# EAGLE board ESC (EAGLE 9.4.1)
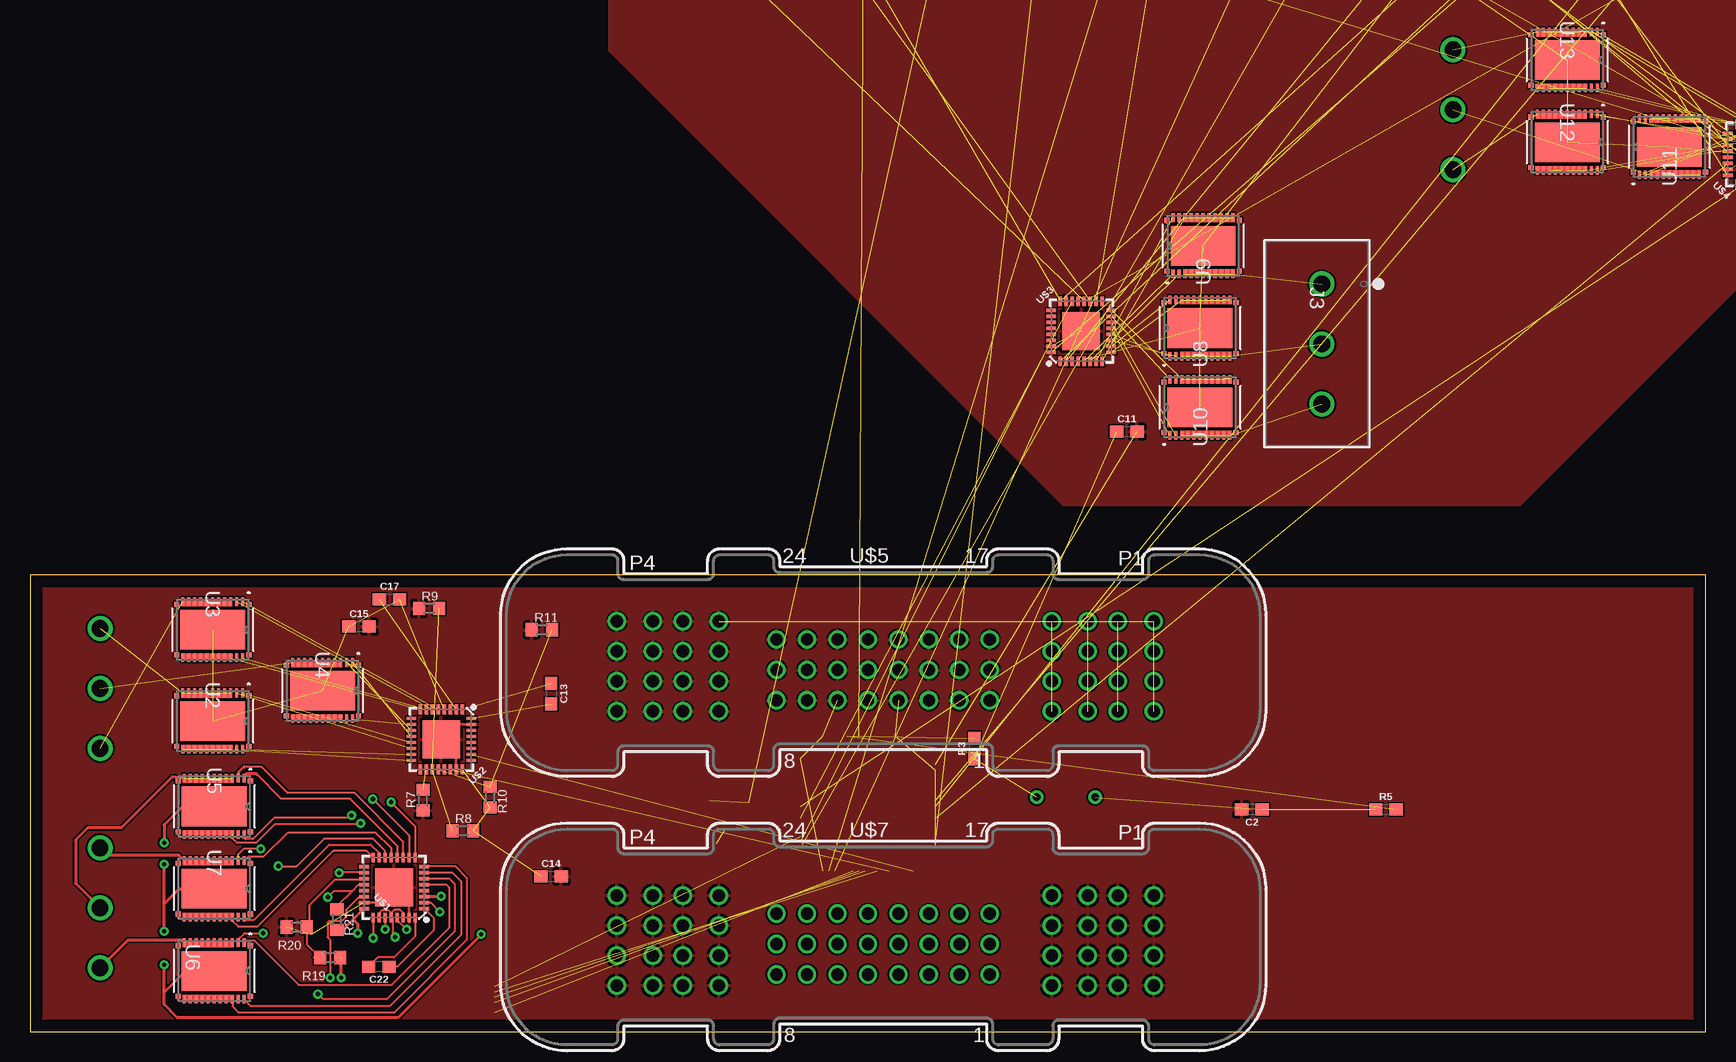
[diagram p0: board, top side]
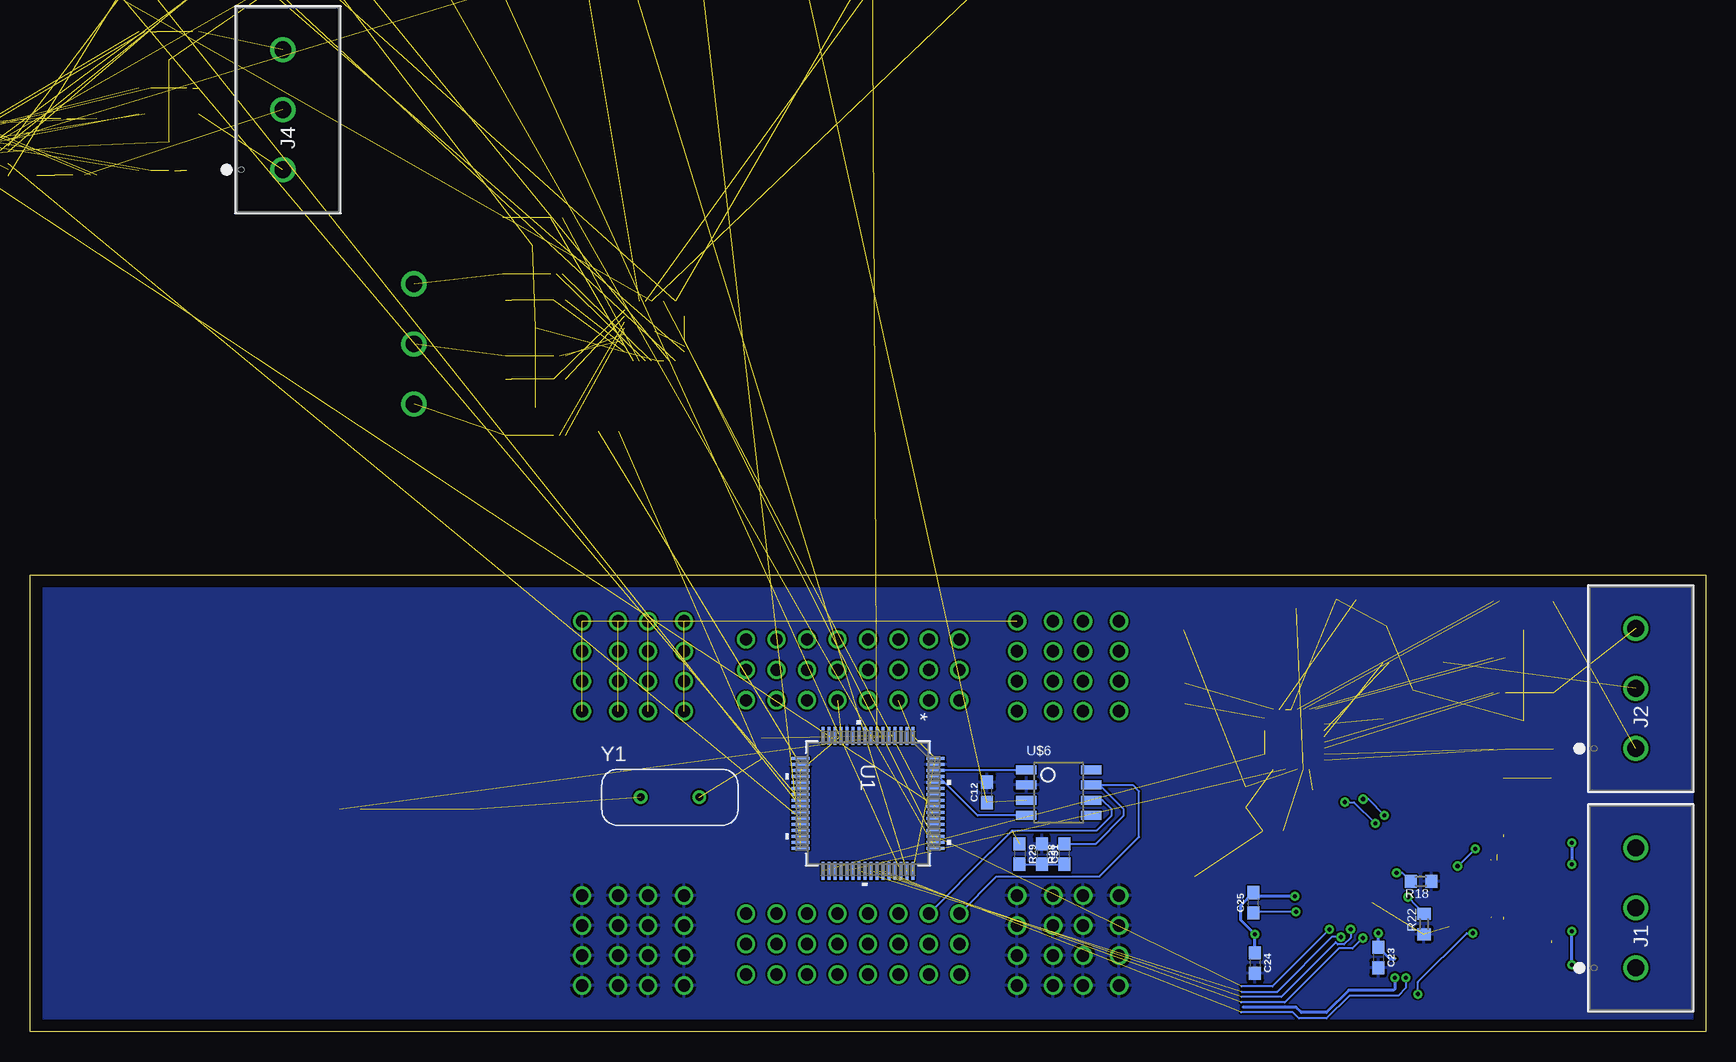
[diagram p1: board, bottom side, seen from below]

Size 139.7 x 38.1 mm. Coordinates in mm from the lower left corner, seen from the top.
Outline: 0,0 139.7,0 139.7,38.1 0,38.1 0,0
Copper layers (1*16): Top 0.035mm / dielectric 1.5mm / Bottom 0.035mm
Design rules "default": minimum track width 6mil, minimum drill 0.35mm, track to track 6mil, track to pad 6mil, pad to pad 6mil, via to via 6mil, smd to smd 6mil, copper to edge 40mil, drill to drill 6mil, minimum pad ring 10mil, minimum via ring 8mil, stop-mask expansion 4mil, vias tented up to drill 0mil, thermal gap 10mil

## Footprints (pad centres in the part's own frame; a part is rotated, then mirrored left to right if it is on the bottom)
0603 = smd 1.1 x 1: 1 -0.85,0; 2 0.85,0
LED_VISHAY_TLMX1100 = smd 0.66 x 0.889: 1 -0.876,0; 2 0.876,0
CONN_1755529 = drill 1.397 pad 1.905: 1 0,0; 2 5.004,0; 3 10.008,0
R0603 = smd 1 x 1.1: 1 -0.85,0; 2 0.85,0
SW_2512 = smd 1.8 x 3.2: 1 -2.8,0; 2 2.8,0
FE05-1 = drill 0.813 long: 1 -5.08,0; 2 -2.54,0; 3 0,0; 4 2.54,0; 5 5.08,0
LQFP-64 = smd 1.473 x 0.229: 1 -5.626,3.75; 2 -5.626,3.25; 3 -5.626,2.75; 4 -5.626,2.25; 5 -5.626,1.75; 6 -5.626,1.25; 7 -5.626,0.75; 8 -5.626,0.25; 9 -5.626,-0.25; 10 -5.626,-0.75; 11 -5.626,-1.25; 12 -5.626,-1.75; 13 -5.626,-2.25; 14 -5.626,-2.75; 15 -5.626,-3.25; 16 -5.626,-3.75; 33 5.626,-3.75; 34 5.626,-3.25; 35 5.626,-2.75; 36 5.626,-2.25; 37 5.626,-1.75; 38 5.626,-1.25; 39 5.626,-0.75; 40 5.626,-0.25; 41 5.626,0.25; 42 5.626,0.75; 43 5.626,1.25; 44 5.626,1.75; 45 5.626,2.25; 46 5.626,2.75; 47 5.626,3.25; 48 5.626,3.75 | smd 0.229 x 1.473: 17 -3.75,-5.626; 18 -3.25,-5.626; 19 -2.75,-5.626; 20 -2.25,-5.626; 21 -1.75,-5.626; 22 -1.25,-5.626; 23 -0.75,-5.626; 24 -0.25,-5.626; 25 0.25,-5.626; 26 0.75,-5.626; 27 1.25,-5.626; 28 1.75,-5.626; 29 2.25,-5.626; 30 2.75,-5.626; 31 3.25,-5.626; 32 3.75,-5.626; 49 3.75,5.626; 50 3.25,5.626; 51 2.75,5.626; 52 2.25,5.626; 53 1.75,5.626; 54 1.25,5.626; 55 0.75,5.626; 56 0.25,5.626; 57 -0.25,5.626; 58 -0.75,5.626; 59 -1.25,5.626; 60 -1.75,5.626; 61 -2.25,5.626; 62 -2.75,5.626; 63 -3.25,5.626; 64 -3.75,5.626
DMM0022A = smd 0.711 x 0.254: 1 -2.35,2.5; 2 -2.35,2; 3 -2.35,1.5; 4 -2.35,1; 5 -2.35,0.5; 6 -2.35,0; 7 -2.35,-0.5; 8 -2.35,-1; 9 -2.35,-1.5; 10 -2.35,-2; 11 -2.35,-2.5; 12 2.35,-2.5; 13 2.35,-2; 14 2.35,-1.5; 15 2.35,-1; 16 2.35,-0.5; 17 2.35,0; 18 2.35,0.5; 19 2.35,1; 20 2.35,1.5; 21 2.35,2; 22 2.35,2.5 | smd 0.432 x 0.432: 23 -2.115,3.013; 24 -2.115,-3.013; 25 2.115,-3.013; 26 2.115,3.013 | smd 3.302 x 5.41: 27 0,0
QFN-32-5X5MM = smd 0.285 x 0.8: 1 -1.75,-2.5; 2 -1.25,-2.5; 3 -0.75,-2.5; 4 -0.25,-2.5; 5 0.25,-2.5; 6 0.75,-2.5; 7 1.25,-2.5; 8 1.75,-2.5; 17 1.75,2.5; 18 1.25,2.5; 19 0.75,2.5; 20 0.25,2.5; 21 -0.25,2.5; 22 -0.75,2.5; 23 -1.25,2.5; 24 -1.75,2.5 | smd 0.8 x 0.285: 9 2.5,-1.75; 10 2.5,-1.25; 11 2.5,-0.75; 12 2.5,-0.25; 13 2.5,0.25; 14 2.5,0.75; 15 2.5,1.25; 16 2.5,1.75; 25 -2.5,1.75; 26 -2.5,1.25; 27 -2.5,0.75; 28 -2.5,0.25; 29 -2.5,-0.25; 30 -2.5,-0.75; 31 -2.5,-1.25; 32 -2.5,-1.75 | smd 3.15 x 3.15: EP 0,0
SAMTEC = drill 1.02 pad 1.22: 1 10.16,-2.84; 2 7.62,-2.84; 3 5.08,-2.84; 4 2.54,-2.84; 5 0,-2.84; 6 -2.54,-2.84; 7 -5.08,-2.84; 8 -7.62,-2.84; 9 10.16,-0.3; 10 7.62,-0.3; 11 5.08,-0.3; 12 2.54,-0.3; 13 0,-0.3; 14 -2.54,-0.3; 15 -5.08,-0.3; 16 -7.62,-0.3; 17 10.16,2.24; 18 7.62,2.24; 19 5.08,2.24; 20 2.54,2.24; 21 0,2.24; 22 -2.54,2.24; 23 -5.08,2.24; 24 -7.62,2.24; P1-1 23.83,-3.75; P1-2 23.83,-1.25; P1-3 23.83,1.25; P1-4 23.83,3.75; P1-5 20.83,-3.75; P1-6 20.83,-1.25; P1-7 20.83,1.25; P1-8 20.83,3.75; P2-1 18.33,-3.75; P2-2 18.33,-1.25; P2-3 18.33,1.25; P2-4 18.33,3.75; P2-5 15.33,-3.75; P2-6 15.33,-1.25; P2-7 15.33,1.25; P2-8 15.33,3.75; P3-1 -12.43,-3.75; P3-2 -12.43,-1.25; P3-3 -12.43,1.25; P3-4 -12.43,3.75; P3-5 -15.43,-3.75; P3-6 -15.43,-1.25; P3-7 -15.43,1.25; P3-8 -15.43,3.75; P4-1 -17.93,-3.75; P4-2 -17.93,-1.25; P4-3 -17.93,1.25; P4-4 -17.93,3.75; P4-5 -20.93,-3.75; P4-6 -20.93,-1.25; P4-7 -20.93,1.25; P4-8 -20.93,3.75
TCAN337D = smd 1.7 x 0.75: CANH 5.4,2.54; CANL 5.4,1.27; FAULT 5.4,0; GND 0,2.54; RXD 0,0; S 5.4,3.81; TXD 0,3.81; VCC 0,1.27
XTAL_ECS-80-S-4X = drill 0.63 pad 1.03: 1 -2.44,0; 2 2.44,0

## Placement (x,y rotation side)
C1  2.2uF  [0603]  93.22,97.03 0 top  (outside the outline)
C2  4.7uF  [0603]  101.85,18.54 180 top
C3  2.2uF  [0603]  85.6,97.03 0 top  (outside the outline)
C4  4.7uF  [0603]  81.79,97.03 0 top  (outside the outline)
C5  4.7uF  [0603]  77.98,97.03 0 top  (outside the outline)
C10  4.7uF  [0603]  70.36,97.03 0 top  (outside the outline)
C11  4.7uF  [0603]  91.44,50.04 0 top  (outside the outline)
C12  4.7uF  [0603]  59.92,19.96 90 bottom
C13  47nF  [0603]  43.43,28.19 270 top
C14  1.0uF  [0603]  43.43,12.95 0 top
C15  0.1uF  [0603]  27.43,33.78 0 top
C16  4.7uF  [0603]  144.02,102.11 0 top  (outside the outline)
C17  1.0uF  [0603]  29.97,36.07 0 top
C18  47nF  [0603]  136.4,102.11 0 top  (outside the outline)
C19  1.0uF  [0603]  132.59,102.11 0 top  (outside the outline)
C20  0.1uF  [0603]  128.78,102.11 0 top  (outside the outline)
C21  1.0uF  [0603]  124.97,102.11 0 top  (outside the outline)
C22  47nF  [0603]  29.08,5.44 180 top
C23  1.0uF  [0603]  27.3,6.2 270 bottom
C24  0.1uF  [0603]  37.59,5.74 270 bottom
C25  1.0uF  [0603]  37.72,10.77 90 bottom
C26  47nF  [0603]  105.92,102.11 0 top  (outside the outline)
C27  1.0uF  [0603]  102.11,102.11 0 top  (outside the outline)
C28  0.1uF  [0603]  98.3,102.11 0 top  (outside the outline)
C29  1.0uF  [0603]  94.49,102.11 0 top  (outside the outline)
C30  4.7uF  [0603]  90.68,102.11 0 top  (outside the outline)
C31  0.1uF  [0603]  55.35,14.83 270 bottom
C32  4.7uF  [0603]  83.06,102.11 0 top  (outside the outline)
C33  4.7uF  [0603]  79.25,102.11 0 top  (outside the outline)
C34  4.7uF  [0603]  75.44,102.11 0 top  (outside the outline)
C35  4.7uF  [0603]  71.63,102.11 0 top  (outside the outline)
C38  4.7uF  [0603]  67.82,102.11 0 top  (outside the outline)
C39  4.7uF  [0603]  64.01,102.11 0 top  (outside the outline)
C40  4.7uF  [0603]  60.2,102.11 0 top  (outside the outline)
C41  4.7uF  [0603]  151.64,105.92 0 top  (outside the outline)
GREEN_LED  TLMS1100-GS08  [LED_VISHAY_TLMX1100]  114.81,105.92 0 top  (outside the outline)
J1  1755529  [CONN_1755529]  5.84,5.33 90 bottom
J2  1755529  [CONN_1755529]  5.84,23.62 90 bottom
J3  1755529  [CONN_1755529]  107.7,62.36 270 top  (outside the outline)
J4  1755529  [CONN_1755529]  118.62,71.88 90 bottom  (outside the outline)
R1  1k  [0603]  147.83,105.92 0 top  (outside the outline)
R2  1k  [0603]  144.02,105.92 0 top  (outside the outline)
R3  1k  [0603]  78.74,23.62 90 top
R4  1k  [0603]  136.4,105.92 0 top  (outside the outline)
R5  1k  [0603]  113.03,18.54 0 top
R7  47k  [R0603]  32.77,19.3 90 top
R8  [R0603]  36.07,16.76 0 top
R9  [R0603]  33.27,35.31 0 top
R10  [R0603]  38.35,19.56 270 top
R11  [R0603]  42.67,33.53 0 top
R13  47k  [R0603]  93.22,91.95 0 top  (outside the outline)
R14  [R0603]  67.82,90.68 0 top  (outside the outline)
R15  [R0603]  62.74,90.68 0 top  (outside the outline)
R16  [R0603]  57.66,90.68 0 top  (outside the outline)
R17  [R0603]  150.37,97.03 0 top  (outside the outline)
R18  47k  [R0603]  23.75,12.55 180 bottom
R19  [R0603]  25.02,6.2 0 top
R20  [R0603]  22.23,8.74 0 top
R21  [R0603]  25.58,9.35 270 top
R22  [R0603]  23.5,8.99 90 bottom
R23  47k  [R0603]  83.06,91.95 0 top  (outside the outline)
R24  [R0603]  124.97,97.03 0 top  (outside the outline)
R25  [R0603]  119.89,97.03 0 top  (outside the outline)
R26  [R0603]  114.81,97.03 0 top  (outside the outline)
R27  [R0603]  109.73,97.03 0 top  (outside the outline)
R28  60  [0603]  53.47,14.83 90 bottom
R29  60  [0603]  57.2,14.83 270 bottom
RED_LED  TLMS1100-GS08  [LED_VISHAY_TLMX1100]  104.65,105.92 0 top  (outside the outline)
RESET1  [SW_2512]  133.86,90.68 0 top  (outside the outline)
SV2  [FE05-1]  104.65,90.68 0 top  (outside the outline)
U1  STM32F405RGT6  [LQFP-64]  69.85,19.05 270 bottom
U2  CSD88584Q5DCT  [DMM0022A]  15.24,25.91 270 top
U3  CSD88584Q5DCT  [DMM0022A]  15.24,33.53 270 top
U4  CSD88584Q5DCT  [DMM0022A]  24.38,28.45 270 top
U5  CSD88584Q5DCT  [DMM0022A]  15.37,18.8 270 top
U6  CSD88584Q5DCT  [DMM0022A]  15.37,5.08 270 top
U7  CSD88584Q5DCT  [DMM0022A]  15.37,11.94 270 top
U8  CSD88584Q5DCT  [DMM0022A]  97.54,58.67 90 top  (outside the outline)
U9  CSD88584Q5DCT  [DMM0022A]  97.79,65.53 90 top  (outside the outline)
U10  CSD88584Q5DCT  [DMM0022A]  97.54,52.07 90 top  (outside the outline)
U11  CSD88584Q5DCT  [DMM0022A]  136.65,73.79 90 top  (outside the outline)
U12  CSD88584Q5DCT  [DMM0022A]  128.14,74.17 270 top  (outside the outline)
U13  CSD88584Q5DCT  [DMM0022A]  128.14,81.03 270 top  (outside the outline)
U$1  DRV8320H  [QFN-32-5X5MM]  30.35,12.04 90 top
U$2  DRV8320H  [QFN-32-5X5MM]  34.29,24.38 180 top
U$3  DRV8320H  [QFN-32-5X5MM]  87.63,58.42 0 top  (outside the outline)
U$4  DRV8320H  [QFN-32-5X5MM]  144.02,73.15 90 top  (outside the outline)
U$5  SAMTEC  [SAMTEC]  69.85,30.48 0 top
U$6  TCAN337D  [TCAN337D]  56.64,18.03 0 bottom
U$7  SAMTEC  [SAMTEC]  69.85,7.62 0 top
Y1  ECS-80-S-4X  [XTAL_ECS-80-S-4X]  86.36,19.56 0 bottom

## Library data of the parts
C1 C3 = SparkFun-Capacitors; PROD_ID: CAP-07888
C2 C4 C5 C10-C12 C16 C30 C32-C35 C38-C41 = SparkFun-Capacitors; PROD_ID: CAP-08280
C13 C18 C22 C26 = SparkFun-Capacitors; PROD_ID: CAP-08605
C14 C17 C19 C21 C23 C25 C27 C29 = SparkFun-Capacitors; PROD_ID: CAP-00868
C15 C20 C24 C28 C31 = SparkFun-Capacitors; PROD_ID: CAP-00810
GREEN_LED RED_LED = VESC_SHIT; MANUFACTURER_PART_NUMBER: TLMS1100GS08; VENDOR: Vishay
J1-J4 = VESC_SHIT; MANUFACTURER_PART_NUMBER: 1755529; VENDOR: Phoenix Contact
R1-R5 R28 R29 = SparkFun-Resistors; PROD_ID: RES-07856
R7-R11 R13-R27 = rcl; SPICEPREFIX: R
RESET1 = DiscreteComponents
SV2 = con-lsta; OC_FARNELL: unknown; OC_NEWARK: unknown
U1 = VESC_SHIT; MANUFACTURER_PART_NUMBER: STM32F405RGT6; VENDOR: STMicroelectronics
U2-U13 = VESC_SHIT; MANUFACTURER_PART_NUMBER: CSD88584Q5DCT; VENDOR: Texas Instruments
U$1-U$5 U$7 = VESC_SHIT
U$6 = PI_Shield_Library
Y1 = ECS-80-S-4X; DESCRIPTION: Crystal 8MHz Series 2-Pin HC-49/U; DIGI-KEY_PART_NUMBER: X1057-ND; DIGI-KEY_PURCHASE_URL: https://www.digikey.com/product-detail/en/ecs-inc/ECS-80-S-4X/X1057-ND/827549?utm_source=snapeda&utm_medium=aggregator&utm_campaign=symbol; MF: ECS International; MP: ECS-80-S-4X; PACKAGE: HC-49/US ECS International

## Nets
3V3: U1.1 U1.13 U1.19 U1.32 U1.48 U1.64 U$5.1 U$5.2 U$5.3 U$5.4 U$5.5 U$5.6 U$5.7 U$5.8 U$5.9 U$5.10 U$5.11 U$5.12 U$5.13 U$5.14 U$5.15 U$5.16 U$5.17 U$5.18 U$5.19 U$5.20 U$5.21 U$5.22 U$5.23 U$5.24
12V: U$5.P1-1 U$5.P1-2 U$5.P1-3 U$5.P1-4 U$5.P1-5 U$5.P1-6 U$5.P1-7 U$5.P1-8 U$5.P2-1 U$5.P2-2 U$5.P2-3 U$5.P2-4 U$5.P2-5 U$5.P2-6 U$5.P2-7 U$5.P2-8 U$5.P3-1 U$5.P3-2 U$5.P3-3 U$5.P3-4 U$5.P3-5 U$5.P3-6 U$5.P3-7 U$5.P3-8 U$5.P4-1 U$5.P4-2 U$5.P4-3 U$5.P4-4 U$5.P4-5 U$5.P4-6 U$5.P4-7 U$5.P4-8
+3V3: C4.1 C5.1 C12.1 C16.1 C30.1 C32.1 C33.1 C34.1 C35.1 C38.1 C39.1 C40.1 C41.1 R4.2 SV2.5 U$6.VCC
CAN_H: R28.2 U$6.CANH U$7.24
CAN_L: R29.1 U$6.CANL U$7.23
CAN_RX: U1.61 U$6.RXD
CAN_TX: U1.62 U$6.TXD
DVDD_1: C14.1 R8.2 R10.2 U$2.24
DVDD_2: C23.1 R19.2 R21.2 U$1.24
DVDD_3: C19.1 R14.2 R16.2 U$3.24
DVDD_4: C27.1 R24.2 R26.2 U$4.24
EN_1: U1.37 U$2.22
EN_2: U1.43 U$1.22
EN_3: U1.54 U$3.22
EN_4: U1.27 U$4.22
FAULT_1: U1.38
FAULT_2: U1.44
FAULT_3: U1.55
FAULT_4: U1.28
GHA_1: U3.1 U$2.5
GHA_2: U6.1 U$1.5
GHA_3: U9.1 U$3.5
GHA_4: U12.1 U$4.5
GHB_1: U4.1 U$2.12
GHB_2: U5.1 U$1.12
GHB_3: U8.1 U$3.12
GHB_4: U11.1 U$4.12
GHC_1: U2.1 U$2.13
GHC_2: U7.1 U$1.13
GHC_3: U10.1 U$3.13
GHC_4: U13.1 U$4.13
GLA_1: U3.22 U$2.7
GLA_2: U6.22 U$1.7
GLA_3: U9.22 U$3.7
GLA_4: U12.22 U$4.7
GLB_1: U4.22 U$2.10
GLB_2: U5.22 U$1.10
GLB_3: U8.22 U$3.10
GLB_4: U11.22 U$4.10
GLC_1: U2.22 U$2.15
GLC_2: U7.22 U$1.15
GLC_3: U10.22 U$3.15
GLC_4: U13.22 U$4.15
GND: C1.2 C2.2 C3.2 C4.2 C5.2 C10.2 C11.2 C12.2 C14.2 C15.2 C16.2 C19.2 C20.2 C23.2 C24.2 C27.2 C28.2 C30.2 C31.1 C32.2 C33.2 C34.2 C35.2 C38.2 C39.2 C40.2 C41.2 GREEN_LED.1 R7.1 R9.1 R11.1 R13.1 R15.1 R17.1 R18.1 R20.1 R22.1 R23.1 R25.1 R27.1 RED_LED.1 RESET1.1 SV2.3 U1.12 U1.18 U1.60 U1.63 U$1.23 U$1.31 U$1.EP U$2.23 U$2.31 U$2.EP U$3.23 U$3.31 U$3.EP U$4.23 U$4.31 U$4.EP U$6.GND U$7.P1-1 U$7.P1-2 U$7.P1-3 U$7.P1-4 U$7.P1-5 U$7.P1-6 U$7.P1-7 U$7.P1-8 U$7.P2-1 U$7.P2-2 U$7.P2-3 U$7.P2-4 U$7.P2-5 U$7.P2-6 U$7.P2-7 U$7.P2-8 U$7.P3-1 U$7.P3-2 U$7.P3-3 U$7.P3-4 U$7.P3-5 U$7.P3-6 U$7.P3-7 U$7.P3-8 U$7.P4-1 U$7.P4-2 U$7.P4-3 U$7.P4-4 U$7.P4-5 U$7.P4-6 U$7.P4-7 U$7.P4-8
IDRIVE: R19.1 R20.2 U$1.19
INHA_1: U1.36
INHA_2: U1.42 U$1.25
INHA_3: U1.53
INHA_4: U1.59
INHB_1: U1.35
INHB_2: U1.41 U$1.27
INHB_3: U1.52
INHB_4: U1.58
INHC_1: U1.34
INHC_2: U1.40
INHC_3: U1.51 U$1.29
INHC_4: U1.57
INL_1: U1.33 U$2.26 U$2.28 U$2.30
INL_2: U1.39 U$1.26 U$1.28 U$1.30
INL_3: U1.50 U$3.26 U$3.28 U$3.30
INL_4: U1.56 U$4.26 U$4.28 U$4.30
N$1: R1.2 U1.24
N$2: GREEN_LED.2 R1.1
N$3: R2.1 RED_LED.2
N$4: R2.2 U1.25
N$5: C1.1 U1.47
N$6: C3.1 U1.31
N$7: C11.1 R3.1 Y1.2
N$8: C2.1 R5.1 Y1.1
N$9: C13.1 U$2.1
N$10: U$2.25
N$11: U$2.27
N$14: U$2.29
N$16: C13.2 U$2.32
N$17: R8.1 R9.2 U$2.19
N$18: R7.2 U$2.18
N$19: R10.1 R11.2 U$2.20
N$20: U$3.25
N$21: U$3.27
N$22: U$3.29
N$23: C21.1 U$3.2
N$24: C18.1 U$3.1
N$25: C18.2 U$3.32
N$26: R14.1 R15.2 U$3.19
N$27: R13.2 U$3.18
N$28: R16.1 R17.2 U$3.20
N$30: C25.1 U$1.2
N$31: C22.1 U$1.1
N$32: C22.2 U$1.32
N$34: C17.1 U$2.2
N$35: R18.2 U$1.18
N$37: U$4.25
N$38: U$4.27
N$39: U$4.29
N$40: C29.1 U$4.2
N$41: C26.1 U$4.1
N$42: C26.2 U$4.32
N$43: R24.1 R25.2 U$4.19
N$44: R23.2 U$4.18
N$45: R26.1 R27.2 U$4.20
N$46: C31.2 R28.1 R29.2
NRST: C10.1 R4.1 RESET1.2 SV2.1 U1.7
OSC_IN: R5.2 U1.5
OSC_OUT: R3.2 U1.6
PHASE_A1: J2.1 U3.3 U3.4 U3.5 U3.6 U3.7 U3.8 U3.9 U3.10 U3.11
PHASE_A2: J1.1 U6.3 U6.4 U6.5 U6.6 U6.7 U6.8 U6.9 U6.10 U6.11
PHASE_A3: J3.1 U9.3 U9.4 U9.5 U9.6 U9.7 U9.8 U9.9 U9.10 U9.11
PHASE_A4: J4.1 U12.3 U12.4 U12.5 U12.6 U12.7 U12.8 U12.9 U12.10 U12.11
PHASE_B1: J2.2 U4.3 U4.4 U4.5 U4.6 U4.7 U4.8 U4.9 U4.10 U4.11
PHASE_B2: J1.2 U5.3 U5.4 U5.5 U5.6 U5.7 U5.8 U5.9 U5.10 U5.11
PHASE_B3: J3.2 U8.3 U8.4 U8.5 U8.6 U8.7 U8.8 U8.9 U8.10 U8.11
PHASE_B4: J4.2 U11.3 U11.4 U11.5 U11.6 U11.7 U11.8 U11.9 U11.10 U11.11
PHASE_C1: J2.3 U2.3 U2.4 U2.5 U2.6 U2.7 U2.8 U2.9 U2.10 U2.11
PHASE_C2: J1.3 U7.3 U7.4 U7.5 U7.6 U7.7 U7.8 U7.9 U7.10 U7.11
PHASE_C3: J3.3 U10.3 U10.4 U10.5 U10.6 U10.7 U10.8 U10.9 U10.10 U10.11
PHASE_C4: J4.3 U13.3 U13.4 U13.5 U13.6 U13.7 U13.8 U13.9 U13.10 U13.11
SHA_1: U3.2 U$2.6
SHA_2: U6.2 U$1.6
SHA_3: U9.2 U$3.6
SHA_4: U12.2 U$4.6
SHB_1: U4.2 U$2.11
SHB_2: U5.2 U$1.11
SHB_3: U8.2 U$3.11
SHB_4: U11.2 U$4.11
SHC_1: U2.2 U$2.14
SHC_2: U7.2 U$1.14
SHC_3: U10.2 U$3.14
SHC_4: U13.2 U$4.14
SLA_1: U3.12 U3.13 U3.14 U3.15 U3.16 U3.17 U3.18 U3.19 U3.20 U$2.8
SLA_2: U6.12 U6.13 U6.14 U6.15 U6.16 U6.17 U6.18 U6.19 U6.20 U$1.8
SLA_3: U9.12 U9.13 U9.14 U9.15 U9.16 U9.17 U9.18 U9.19 U9.20 U$3.8
SLA_4: U12.12 U12.13 U12.14 U12.15 U12.16 U12.17 U12.18 U12.19 U12.20 U$4.8
SLB_1: U$2.9
SLB_2: U5.12 U5.13 U5.14 U5.15 U5.16 U5.17 U5.18 U5.19 U5.20 U$1.9
SLB_3: U8.12 U8.13 U8.14 U8.15 U8.16 U8.17 U8.18 U8.19 U8.20 U$3.9
SLB_4: U11.12 U11.13 U11.14 U11.15 U11.16 U11.17 U11.18 U11.19 U11.20 U$4.9
SLC_1: U2.12 U2.13 U2.14 U2.15 U2.16 U2.17 U2.18 U2.19 U2.20 U$2.16
SLC_1B: U4.12 U4.13 U4.14 U4.15 U4.16 U4.17 U4.18 U4.19 U4.20
SLC_2: U7.12 U7.13 U7.14 U7.15 U7.16 U7.17 U7.18 U7.19 U7.20 U$1.16
SLC_3: U10.12 U10.13 U10.14 U10.15 U10.16 U10.17 U10.18 U10.19 U10.20 U$3.16
SLC_4: U13.12 U13.13 U13.14 U13.15 U13.16 U13.17 U13.18 U13.19 U13.20 U$4.16
SWCLK: SV2.4 U1.49
SWDIO: SV2.2 U1.46
VDS: R21.1 R22.2 U$1.20
VM_1: C15.1 C17.2 U2.27 U3.27 U4.27 U$2.3 U$2.4
VM_2: C24.1 C25.2 U5.27 U6.27 U7.27 U$1.3 U$1.4
VM_3: C20.1 C21.2 U8.27 U9.27 U10.27 U$3.3 U$3.4
VM_4: C28.1 C29.2 U11.27 U12.27 U13.27 U$4.3 U$4.4

## Tracks (layer width: path | path; a pad name or v marks a point on that pad's centre or on a via)
3V3  (6 unrouted)
  pour Top: 62.23,33.53 80.26,33.53 80.77,33.02 80.77,32.77 80.77,27.43 80.26,26.92 79.76,26.92 61.98,26.92 61.47,27.43 61.47,33.02 61.98,33.53
12V  (16 unrouted)
  Top 0.152: U$5.P3-5 54.36,26.73 54.42,26.79
  pour Top: 48.77,35.05 57.66,35.05 58.29,34.42 58.29,26.54 57.66,25.91 48.77,25.91 48.13,26.54 48.13,34.42
12V1
  pour Top: 84.96,35.03 93.85,35.03 94.49,34.39 94.49,26.52 93.85,25.88 84.96,25.88 84.33,26.52 84.33,34.39
+3V3  (15 unrouted)
CAN_H
  Bottom 0.152: 50.55,20.57 47.75,20.57 47.24,20.07 47.24,16.26 50.55,12.95 59.14,12.95 U$7.24 62.23,9.91 | 50.55,20.57 U$6.CANH | R28.2 50.86,15.68 48.51,18.03 48.51,18.54 50.55,20.57
CAN_L  (1 unrouted)
  Bottom 0.152: U$6.CANL 50.29,19.3 49.53,18.54 49.53,18.03 50.8,16.76 57.87,16.76 59.64,14.99 59.67,14.96 U$7.23
CAN_RX
  Bottom 0.152: U$6.RXD 60.71,18.03 64.01,21.34 64.19,21.34 U1.61
CAN_TX
  Bottom 0.152: U1.62 64.18,21.84 U$6.TXD
DVDD_1  (3 unrouted)
DVDD_2  (via drill 0.35)  (1 unrouted)
  Top 0.152: 25.87,4.58 25.89,4.55 v25.93,4.52 | 27.85,10.21 U$1.24 | v27.31,8.24 v27.3,8.23 | 26.04,8.47 26.04,8.23 25.84,8.23 R21.2
  Top 0.254: R19.2 25.89,6.18 25.89,4.55 | 26.94,9.38 26.06,8.5 R21.2 25.87,8.21 | 26.94,9.38 27.31,9.01 v27.31,8.24 | 26.94,9.38 27.78,10.21 27.85,10.21
  Bottom 0.254: v25.93,4.52 25.93,3.59 26.04,3.48 29.77,3.48 31.62,1.63 33.73,1.63 34.16,2.06 38.58,2.06 | v27.3,8.23 C23.1 26.35,6.1 25.91,6.1
DVDD_3  (3 unrouted)
DVDD_4  (3 unrouted)
EN_1  (1 unrouted)
EN_2  (via drill 0.35)  (1 unrouted)
  Top 0.152: U$1.22 27.72,11.16 27.36,11.16 26.36,10.16 26.36,9.6 25.98,9.23 24.93,9.23 24.8,9.09 24.8,7.9 25.02,7.68 v25.02,4.52
  Bottom 0.152: v25.02,4.52 25.02,3.66 25.65,3.02 29.72,3.02 31.62,1.12 33.91,1.12 34.42,1.63 38.73,1.63
EN_3  (1 unrouted)
EN_4  (1 unrouted)
GHA_1  (1 unrouted)
GHA_2
  Top 0.152: U$1.5 34.67,12.29 34.92,12.04 34.92,8.69 30.15,3.91 22.39,3.91 18.69,7.61 18.07,7.61 17.94,7.48 17.94,7.47 U6.1
GHA_3  (1 unrouted)
GHA_4  (1 unrouted)
GHB_1  (1 unrouted)
GHB_2
  Top 0.152: 18.92,21.46 20.95,19.43 26.7,19.43 30.6,15.52 U$1.12
  Top 0.254: U5.1 17.89,21.27 17.89,21.34 18.05,21.51 18.87,21.51 18.92,21.46
GHB_3  (1 unrouted)
GHB_4  (1 unrouted)
GHC_1  (1 unrouted)
GHC_2  (1 unrouted)
  Top 0.152: U$1.13 30.1,15.34 28.83,16.61 21.49,16.61 19.45,14.58 18.18,14.58 17.94,14.34 17.94,14.33
GHC_3  (1 unrouted)
GHC_4  (1 unrouted)
GLA_1  (1 unrouted)
GLA_2
  Top 0.152: U6.22 17.94,2.64 17.94,2.63 18.37,2.19 30.03,2.19 35.94,8.1 35.94,12.55 35.2,13.29 U$1.7
GLA_3  (1 unrouted)
GLA_4  (1 unrouted)
GLB_1  (1 unrouted)
GLB_2  (via drill 0.35)
  Top 0.152: U$1.10 31.6,16.38 v28.57,19.41 | v26.8,18.06 26.61,17.87 20.38,17.87 18.6,16.08 17.98,16.08 17.87,16.19 U5.22
  Bottom 0.152: v26.8,18.06 28.15,19.41 v28.57,19.41
GLB_3  (1 unrouted)
GLB_4  (1 unrouted)
GLC_1  (1 unrouted)
GLC_2  (1 unrouted)
  Top 0.152: 17.94,9.49 18.07,9.35 18.69,9.35 24.93,15.6 28.41,15.6 29.1,14.9 U$1.15
GLC_3  (1 unrouted)
GLC_4  (1 unrouted)
GND  (5 unrouted)
  Top 0.152: U$1.31 31.6,10.79 U$1.EP 29.1,10.79 U$1.23 | U$2.23 35.54,23.13 34.42,24.26 | 34.42,24.26 U$2.EP | U$2.31 35.79,25.63 34.42,24.26
  pour Top: 0,38.1 0,0 139.7,0 139.7,38.1
  pour Bottom: 0,0 139.7,0 139.7,38.1 0,38.1
  pour Top: 48.26,112.78 48.26,81.79 86.11,43.94 124.21,43.94 168.91,88.65 168.91,106.68 161.54,114.05 49.78,114.05
IDRIVE
  Top 0.152: 23.66,6.2 R19.1 23.07,7.29 R20.2 23.27,8.94 23.27,10.54 25.4,12.66 27.72,12.66 U$1.19
INHA_2  (via drill 0.35)  (1 unrouted)
  Top 0.152: U$1.25 v28.6,7.83 v28.6,7.82
  Bottom 0.152: v28.6,7.82 29.46,6.96 30.61,6.96 35.1,2.46 38.73,2.46
INHB_2  (via drill 0.35)  (1 unrouted)
  Top 0.152: U$1.27 29.6,8.57 v29.62,8.56
  Bottom 0.152: v29.62,8.56 29.62,7.85 30.17,7.3 30.69,7.3 30.86,7.47 35.41,2.92 38.71,2.92
INHC_3  (via drill 0.35)  (1 unrouted)
  Top 0.152: v31.39,8.53 30.6,9.32 U$1.29
  Bottom 0.152: v31.39,8.53 36.13,3.79 38.71,3.79
INL_1  (3 unrouted)
INL_2  (via drill 0.35)  (1 unrouted)
  Top 0.152: 30.1,9.9 30.37,10.17 30.84,10.17 31.1,9.9 U$1.30 | 30.1,9.9 U$1.28 30.23,9.41 30.23,8.11 v30.44,7.9 | U$1.26 29.1,9.9 29.37,10.17 29.84,10.17 30.1,9.9
  Bottom 0.152: v30.44,7.9 30.44,7.93 31.16,7.93 35.74,3.35 38.71,3.35
INL_3  (3 unrouted)
INL_4  (3 unrouted)
N$1  (1 unrouted)
N$2  (1 unrouted)
N$3  (1 unrouted)
N$4  (1 unrouted)
N$5  (1 unrouted)
N$6  (1 unrouted)
N$7  (2 unrouted)
N$8  (2 unrouted)
N$9  (1 unrouted)
N$16  (1 unrouted)
N$17  (2 unrouted)
N$18  (1 unrouted)
N$19  (2 unrouted)
N$23  (1 unrouted)
N$24  (1 unrouted)
N$25  (1 unrouted)
N$26  (2 unrouted)
N$27  (1 unrouted)
N$28  (2 unrouted)
N$30  (via drill 0.35)
  Top 0.152: U$1.2 33.38,10.79 v34.16,10.01
  Bottom 0.152: v34.16,10.01 37.63,10.01 C25.1
N$31
  Top 0.152: U$1.1 33.66,9.49 33.66,8.48 30.61,5.44 C22.1
N$32
  Top 0.152: C22.2 29,6.2 30.35,6.2 32.1,7.95 U$1.32
N$34  (1 unrouted)
N$35  (via drill 0.35)
  Top 0.152: U$1.18 25.8,13.29 v25.78,13.27
  Bottom 0.152: v25.78,13.27 25.32,13.27 R18.2
N$40  (1 unrouted)
N$41  (1 unrouted)
N$42  (1 unrouted)
N$43  (2 unrouted)
N$44  (1 unrouted)
N$45  (2 unrouted)
N$46
  Bottom 0.152: R29.2 C31.2 R28.1
NRST  (4 unrouted)
OSC_IN  (1 unrouted)
OSC_OUT  (1 unrouted)
PHASE_A1  (1 unrouted)
  Top 0.152: U3.11 U3.10 U3.9 U3.8 U3.7 U3.6 U3.5 U3.4 U3.3
PHASE_A2  (1 unrouted)
  Top 0.152: U6.11 U6.10 U6.9 U6.8 U6.7 U6.6 U6.5 U6.4 U6.3
  Top 0.254: 12.87,7.65 12.7,7.65 12.69,7.67 8.17,7.67 J1.1
PHASE_A3  (9 unrouted)
PHASE_A4  (1 unrouted)
  Top 0.152: U12.3 U12.4 U12.5 U12.6 U12.7 U12.8 U12.9 U12.10 U12.11
PHASE_B1  (1 unrouted)
  Top 0.152: U4.11 U4.10 U4.9 U4.8 U4.7 U4.6 U4.5 U4.4 U4.3
PHASE_B2  (8 unrouted)
  Top 0.254: U5.11 11.85,21.25 7.62,17.02 4.83,17.02 3.81,16 3.81,12.37 J1.2
PHASE_B3  (9 unrouted)
PHASE_B4  (7 unrouted)
  Top 0.152: U11.11 U11.4 U11.3
PHASE_C1  (9 unrouted)
PHASE_C2
  Top 0.152: U7.3 16.38,14.26 15.88,14.26 | U7.6 14.86,14.26 14.35,14.26 13.84,14.26 13.34,14.26
  Top 0.254: 13.34,14.26 U7.11 12.4,14.73 6.45,14.73 J1.3 | U7.10 13.84,14.26 | U7.9 14.35,14.26 | U7.8 14.86,14.26 | U7.7 U7.6 15.5,14.28 15.88,14.26 | U7.5 16.38,14.26 | U7.4 U7.3
PHASE_C3  (9 unrouted)
PHASE_C4  (8 unrouted)
  Top 0.152: U13.3 U13.11
SHA_1  (1 unrouted)
SHA_2  (via drill 0.35)
  Top 0.152: v19.43,8.23 17.89,8.23 17.37,7.71 U6.2 | v24,3.15 24.43,2.72 29.72,2.72 35.43,8.43 35.43,12.29 34.94,12.79 U$1.6
  Bottom 0.152: v24,3.15 24,4.17 19.94,8.23 v19.43,8.23
SHA_3  (1 unrouted)
SHA_4  (1 unrouted)
SHB_1  (1 unrouted)
SHB_2
  Top 0.152: U$1.11 31.1,15.84 | 31.11,15.85 31.1,15.84 | 17.89,22.07 19.3,22.07 21.46,19.91 27.05,19.91 31.1,15.86 31.1,15.84
  Top 0.254: 17.89,22.07 17.81,22.07 17.37,21.62 U5.2
SHB_3  (1 unrouted)
SHB_4  (1 unrouted)
SHC_1  (1 unrouted)
SHC_2  (via drill 0.35)  (1 unrouted)
  Top 0.152: v20.7,13.82 22.23,13.82 24.51,16.1 28.6,16.1 29.6,15.1 U$1.14 | v19.23,15.27 17.83,15.27 17.37,14.8
  Bottom 0.152: v20.7,13.82 20.68,13.82 v19.23,15.27
SHC_3  (1 unrouted)
SHC_4  (1 unrouted)
SLA_1  (1 unrouted)
  Top 0.152: U3.20 U3.19 U3.18 U3.17 U3.16 U3.15 U3.14 U3.13 U3.12
SLA_2
  Top 0.152: U6.12 U6.13 U6.14 U6.15 U6.16 U6.17 U6.18 U6.19 U6.20 16.89,2.68 16.89,2.13 17.37,1.65 30.38,1.65 36.45,7.72 36.45,12.8 35.46,13.79 U$1.8
SLA_3  (9 unrouted)
SLA_4  (6 unrouted)
  Top 0.152: U12.12 U12.13 U12.15 U12.20
SLB_2  (via drill 0.35)  (1 unrouted)
  Top 0.152: v27.56,17.37 27.5,17.31 20.41,17.31 18.85,15.75 17.26,15.75 16.87,16.14 16.87,16.25 | v30.1,19.15 32.1,17.15 U$1.9 | U5.20 U5.19 U5.18 U5.17 U5.16 U5.15 U5.14 U5.13 U5.12
  Bottom 0.152: v30.1,19.15 29.34,19.15 v27.56,17.37
SLB_3  (9 unrouted)
SLB_4  (8 unrouted)
  Top 0.152: U11.12 U11.20
SLC_1  (9 unrouted)
SLC_1B
  Top 0.152: U4.20 U4.19 U4.18 U4.17 U4.16 U4.15 U4.14 U4.13 U4.12
SLC_2  (1 unrouted)
  Top 0.152: U$1.16 28.05,15.09 25.27,15.09 18.92,8.74 17.39,8.74 16.87,9.26 16.87,9.4 | U7.20 U7.19 U7.18 U7.17 U7.16 U7.15 U7.14 U7.13 U7.12
SLC_3  (9 unrouted)
SLC_4  (8 unrouted)
  Top 0.152: U13.12 U13.20
SWCLK  (1 unrouted)
SWDIO  (1 unrouted)
VDS  (via drill 0.35)
  Top 0.152: U$1.20 27.42,12.29 26.86,11.73 | R21.1 25.58,10.45 26.86,11.73 | 26.86,11.73 25.32,11.73 v24.83,11.23
  Bottom 0.152: v24.83,11.23 24.81,11.23 R22.2
VM_1  (6 unrouted)
VM_2  (via drill 0.35)
  Top 0.152: 32.87,11.28 U$1.3
  Top 0.254: U$1.4 32.87,11.78 32.87,11.28 | U$1.3 v34.25,11.29 v34.27,11.3 | v37.59,8.13 37.59,8.1 30.68,1.19 12.27,1.19 11.18,2.29 11.18,3.3 | 11.18,3.3 12.93,5.05 U6.27 | 11.18,3.3 v11.18,5.59 | v11.18,8.38 11.18,10.67 | 11.18,10.67 12.42,11.91 U7.27 | 11.18,10.67 v11.18,13.97 | U5.27 12.8,18.9 11.18,17.27 v11.18,15.75
  Bottom 0.152: 37.38,11.28 37.41,11.31 C25.2 37.75,11.59 37.76,11.58
  Bottom 0.254: v34.27,11.3 v34.27,11.31 37.41,11.31 | 37.75,11.59 38.78,10.56 38.78,9.31 v37.59,8.13 C24.1 | v11.18,5.59 v11.18,8.38 | v11.18,15.75 v11.18,13.97
VM_3  (6 unrouted)
VM_4  (6 unrouted)